# EAGLE board bs_prod (EAGLE 6.5.0)
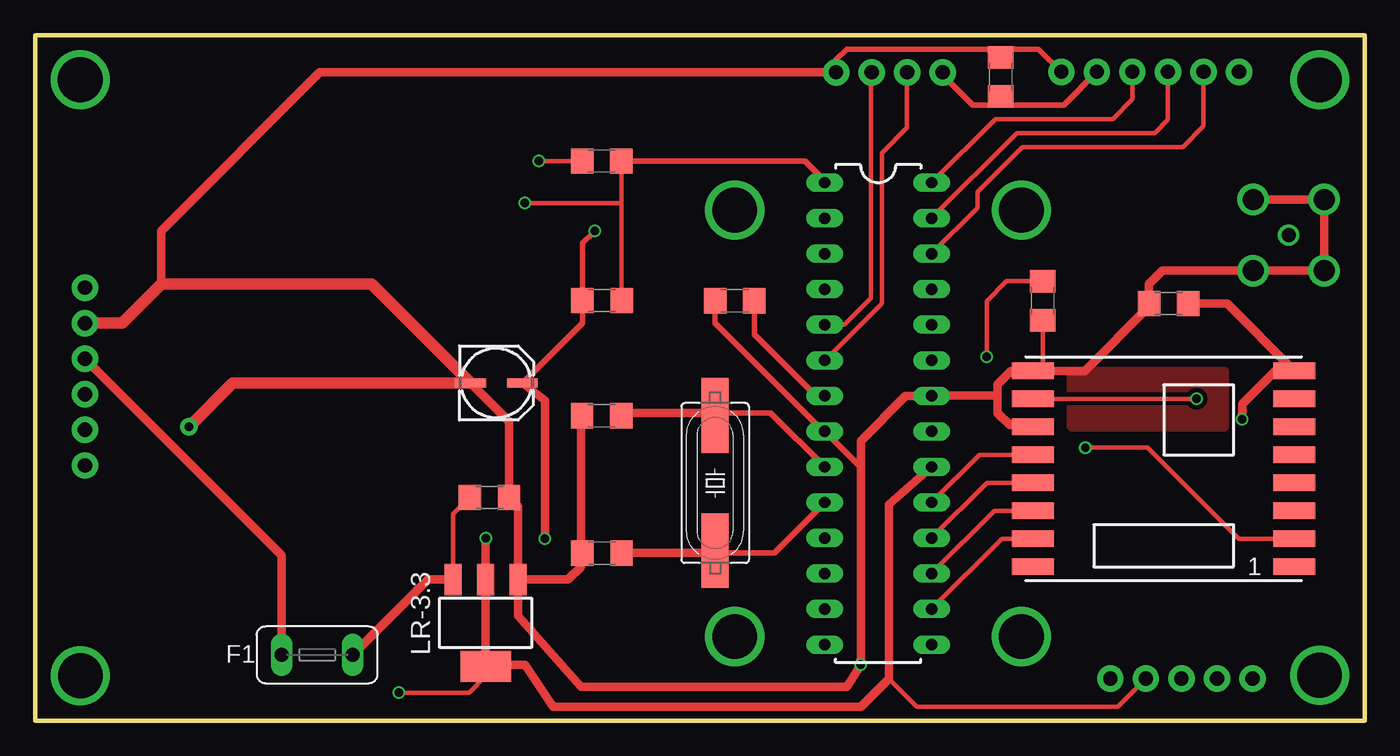
[diagram p0: board, top side]
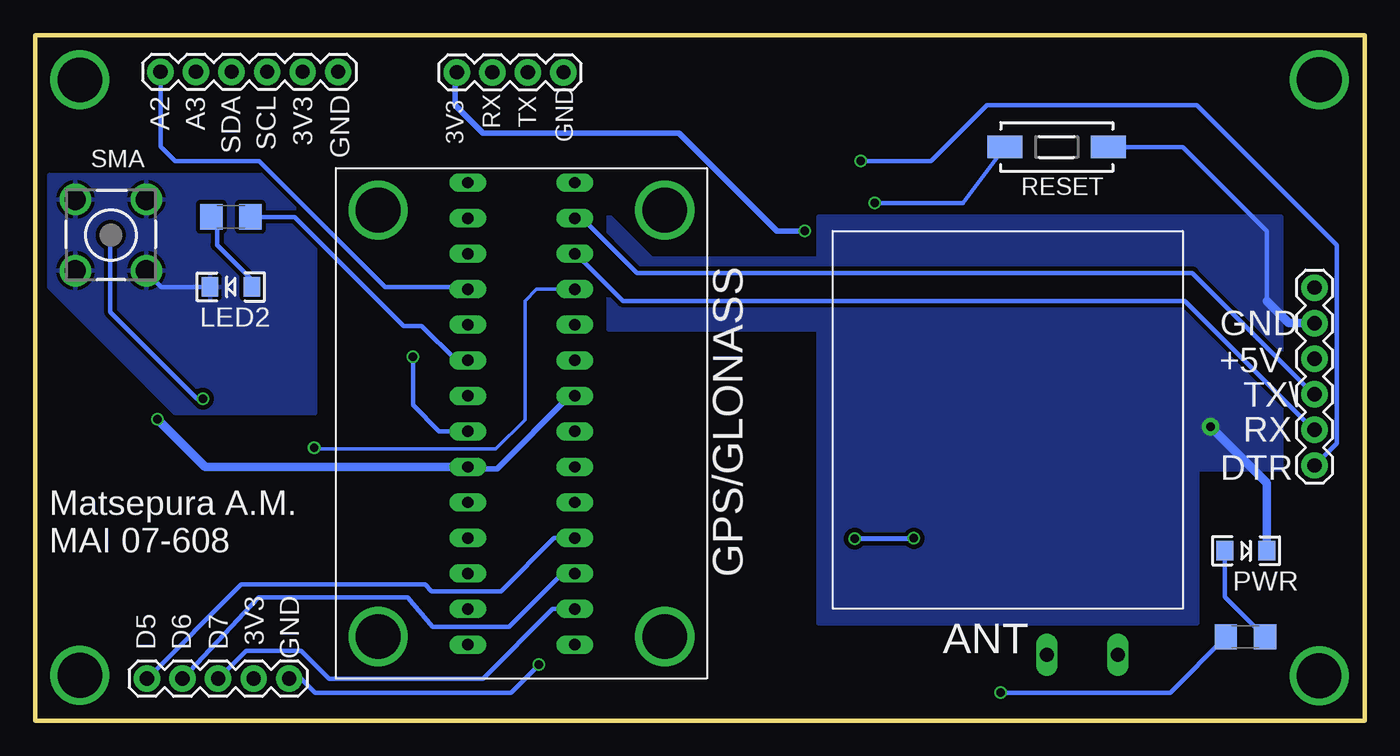
[diagram p1: board, bottom side, seen from below]

Size 95 x 49 mm. Coordinates in mm from the lower left corner, seen from the top.
Outline: 0,49 0,0 95,0 95,49 0,49
Copper layers (1*16): Top 0.035mm / dielectric 1.5mm / Bottom 0.035mm
Design rules "ITEADstudio_DRC *": minimum track width 6mil, minimum drill 12mil, track to track 12mil, track to pad 12mil, pad to pad 12mil, via to via 12mil, smd to smd 0mil, copper to edge 10mil, drill to drill 10mil, minimum pad ring 10mil, minimum via ring 6mil, stop-mask expansion 2mil, vias tented up to drill 100mil, thermal gap 10mil

## Footprints (pad centres in the part's own frame; a part is rotated, then mirrored left to right if it is on the bottom)
1206 = smd 1.6 x 1.8: 1 -1.4,0; 2 1.4,0
PANASONIC_C = smd 2.2 x 0.65: + 1.9,-0.2; - -1.8,-0.2
TE5 = drill 1.016 long: 1 -2.54,0; 2 2.54,0
1X04 = drill 1.016 pad 1.88: 1 0,0; 2 2.54,0; 3 5.08,0; 4 7.62,0
1X06 = drill 1.016 pad 1.88: 1 0,0; 2 2.54,0; 3 5.08,0; 4 7.62,0; 5 10.16,0; 6 12.7,0
1X05 = drill 1.016 pad 1.88: 1 0,0; 2 2.54,0; 3 5.08,0; 4 7.62,0; 5 10.16,0
LED-1206 = smd 1.2 x 1.4: A -1.5,0; C 1.5,0
SOT223 = smd 1.219 x 2.235: 1 -2.311,-3.099; 2 0,-3.099; 3 2.311,-3.099 | smd 3.6 x 2.2: TAB 0,3.099
DTSM-3 = smd 2.5 x 1.6: 1 -3.7,0; 2 3.7,0
BU-SMC-V = drill 1.016: 1 0,0 | drill 1.5: 2 -2.54,2.54; 3 2.54,2.54; 4 2.54,-2.54; 5 -2.54,-2.54
DIL28-3 = drill 0.813 long: 1 -16.51,-3.81; 2 -13.97,-3.81; 3 -11.43,-3.81; 4 -8.89,-3.81; 5 -6.35,-3.81; 6 -3.81,-3.81; 7 -1.27,-3.81; 8 1.27,-3.81; 9 3.81,-3.81; 10 6.35,-3.81; 11 8.89,-3.81; 12 11.43,-3.81; 13 13.97,-3.81; 14 16.51,-3.81; 15 16.51,3.81; 16 13.97,3.81; 17 11.43,3.81; 18 8.89,3.81; 19 6.35,3.81; 20 3.81,3.81; 21 1.27,3.81; 22 -1.27,3.81; 23 -3.81,3.81; 24 -6.35,3.81; 25 -8.89,3.81; 26 -11.43,3.81; 27 -13.97,3.81; 28 -16.51,3.81
RFM69W-XXXS2 = smd 3 x 1.2: 1 -9.35,7; 2 -9.35,5; 3 -9.35,3; 4 -9.35,1; 5 -9.35,-1; 6 -9.35,-3; 7 -9.35,-5; 8 -9.35,-7; 9 9.35,-7; 10 9.35,-5; 11 9.35,-3; 12 9.35,-1; 13 9.35,1; 14 9.35,3; 15 9.35,5; 16 9.35,7
UBLOX = drill 3.2: P$1 -15,9.492; P$2 15.492,9.492; P$3 15.492,-11; P$4 -15,-11
HC49UP = smd 5.334 x 1.93: 1 -4.826,0; 2 4.826,0

## Placement (x,y rotation side)
C1  0.1uF  [1206]  72,30 270 top
C2  10uF  [PANASONIC_C]  32.92,24.32 0 top
C3  20pF  [1206]  40.49,21.79 180 top
C4  20pF  [1206]  40.51,11.97 180 top
C5  0.1uF  [1206]  81,29.81 180 top
C6  0.1uF  [1206]  40.5,39.97 0 top
C7  0.1uF  [1206]  32.48,15.95 0 top
C8  0.1uF  [1206]  50,30 180 top
C9  0.47uF  [1206]  69,46 90 top
F1  500mA  [TE5]  20.16,4.7 0 top
JP2  [1X04]  57.24,46.33 180 bottom
JP3  [1X06]  86.04,46.37 0 bottom
JP4  [1X05]  87,3 0 bottom
JP5  [1X06]  3.57,18.24 90 bottom
LED2  [LED-1206]  81,31 180 bottom
LR-3.3  LM1117IMPX-3.3  [SOT223]  32.2,6.98 180 top
PWR  [LED-1206]  8.47,12.13 0 bottom
R1  10k  [1206]  40.52,30.02 0 top
R2  1k  [1206]  8.51,5.97 0 bottom
R3  1k  [1206]  81,36 180 bottom
RESET  DTSM-3  [DTSM-3]  22,41 0 bottom
SMA  BU-SMC-V  [BU-SMC-V]  89.58,34.7 0 bottom
U1  ATMEGA328P_PDIP  [DIL28-3]  60.25,21.94 270 top
U2  RFM69HW  [RFM69W-XXXS2]  80.65,18 180 top
U$1  UBLOX  [UBLOX]  61,21 90 bottom
Y1  16MHz  [HC49UP]  48.6,16.97 90 top

## Library data of the parts
C1-C9 = SparkFun-Capacitors
F1 = fuse; OC_FARNELL: unknown; OC_NEWARK: unknown
JP2-JP5 = SparkFun-Connectors
LED2 PWR = SparkFun-LED
LR-3.3 = lm1117
R1-R3 = SparkFun-Resistors
RESET = switch-tact
SMA = con-coax; OC_FARNELL: unknown; OC_NEWARK: unknown
U1 = SparkFun-DigitalIC
U2 = SparkFun-RF
U$1 = myGps
Y1 = SparkFun-FreqCtrl

## Nets
3.3V: C2.+ C5.1 C8.1 C9.1 JP2.4 JP3.5 JP4.4 LR-3.3.2 LR-3.3.TAB R1.1 R2.1 U1.7 U1.20 U2.8
5V: C7.1 F1.2 LR-3.3.3
A0: JP3.4 U1.28
A1: JP3.3 U1.27
A2: JP3.2 U1.26
A3: JP3.1 U1.25
D0_RX: JP5.3 U1.2
D1_TX: JP5.2 U1.3
D2: U1.4 U2.2
D5: JP4.1 U1.11
D6: JP4.2 U1.12
D7: JP4.3 U1.13
D10_SS: U1.16 U2.15
D11_MOSI: U1.17 U2.14
D12_MISO: U1.18 U2.13
D13_SCK: U1.19 U2.12
GND: C1.2 C2.- C3.2 C4.2 C5.2 C7.2 C8.2 C9.2 JP2.1 JP3.6 JP4.5 JP5.5 LED2.C LR-3.3.1 PWR.C RESET.2 SMA.2 SMA.3 SMA.4 SMA.5 U1.8 U1.22 U2.9 U2.11
GPS_RX: JP2.2 U1.5
GPS_TX: JP2.3 U1.6
N$5: PWR.A R2.2
N$6: C3.1 U1.9 Y1.2
N$7: C4.1 U1.10 Y1.1
N$8: SMA.1 U2.10
N$9: F1.1 JP5.4
N$11: C6.1 JP5.1
N$12: R3.1 U1.23
N$13: LED2.A R3.2
N$16: C1.1 U1.21
RST: C6.2 R1.2 RESET.1 U1.1

## Tracks (layer width: path | path; a pad name or v marks a point on that pad's centre or on a via)
3.3V  (via drill 0.6)
  Top 0.305: 32,4 32.12,3.88 LR-3.3.TAB 32.2,3.2 31,2 v26,2 | v32.2,13.03 32.2,12.8 | 64.86,46.14 JP2.4 | JP4.4 77.38,1 63,1 61,3 | 55.79,23.21 U1.7 | 69,44 C9.1
  Top 0.406: C2.+ 39.12,28.41 R1.1 39.12,34.12 v40,35 | JP3.5 73.51,44 69,44 67,44 64.86,46.14 | 55.79,23.21 51.4,27.6 C8.1
  Top 0.61: C5.1 85.18,29.81 U2.8 88.62,25 86.26,22.63 v86.26,21.54 | LR-3.3.TAB LR-3.3.2 32.2,12.8 | U1.20 61,15.46 61,3 59,1 37,1 35,4 32,4 | C2.+ 36.43,22.87 v36.43,13
  Bottom 0.305: U1.20 63.94,18 | 75.38,18.14 75.41,18.11 | 56.79,23.21 U1.7 | R2.1 13.89,2 v26,2 | JP2.4 65,46.19
  Bottom 0.406: 63.94,18 62,18 56.79,23.21 | v36.43,13 v32.2,13.03 | 65,46.19 65,44 63,42 49,42 42,35 v40,35
  Bottom 0.61: U1.20 75.38,18.14 | 75.41,18.11 82.83,18.11 v86.26,21.54
5V
  Top 0.305: C7.1 29.89,14.76 LR-3.3.3
  Top 0.61: F1.2 28.08,10.08 LR-3.3.3
A0
  Top 0.305: U1.28 68.61,43 77,43 78.42,44.41 JP3.4
A1
  Top 0.305: U1.27 70.16,42 80,42 80.95,42.95 JP3.3
A2
  Top 0.305: JP3.2 83.5,42.49 82,41 70.54,40.98 67.33,37.77 67.33,36.64 U1.26
A3
  Bottom 0.305: U1.25 64.23,31 70,31 79,40 85,40 86.03,41.03 JP3.1
D0_RX
  Bottom 0.305: U1.2 55.91,35.91 52,32 12.3,32 3.62,23.32 JP5.3
D1_TX
  Bottom 0.305: U1.3 56.37,33.37 53,30 12.84,30 3.62,20.78 JP5.2
D2  (via drill 0.6)
  Top 0.305: U2.2 86,13 79.49,19.51 v75.05,19.51
  Bottom 0.254: 74.95,19.41 62.08,19.41 60,21.48 60,30 59.17,30.83 U1.4
  Bottom 0.305: v75.05,19.51 74.95,19.41
D5
  Bottom 0.305: JP4.1 80.27,9.73 67.13,9.73 66.65,9.25 61.7,9.25 57.9,13.05 U1.11
D6
  Bottom 0.305: JP4.2 79,8.79 68.38,8.79 66.6,6.68 61.11,6.68 57.29,10.51 U1.12
D7
  Bottom 0.305: JP4.3 79.92,5 76,5 74,3 63,3 58.03,7.97 U1.13
D10_SS
  Top 0.305: U1.16 69.09,13 72,13 U2.15
D11_MOSI
  Top 0.305: U1.17 68.55,15 U2.14
D12_MISO
  Top 0.305: U1.18 68.01,17 U2.13
D13_SCK
  Top 0.305: U1.19 67.47,19 72,19 U2.12
GND  (via drill 0.6, 0.6 pad 1.27)
  Top 0.305: U2.11 71.19,21.11 | U2.9 72,25 C1.2 | 79.6,29.6 C5.2 | SMA.4 | JP3.6 71.7,48 71.66,48 71.7,47.95 71.75,47.95 | JP2.1 57.24,47.24 57.22,47.22 57.22,47.07 57.25,47.04 | C3.2 39,21.7 | 39,11 39.11,11.11 C4.2 | 59,18.14 59,18.11 | C7.2 34.51,15.32 | 56.33,20.67 U1.8 | 68,48 68.6,47.4 C9.2 69,48
  Top 0.406: 69.75,25 U2.9 | 71.19,21.11 69.64,21.11 | 57.24,47.24 58,48 68,48 | U1.8 59,18.11 | JP3.6 71.75,47.95 | 57.25,47.04 57.25,46.35 | 71.66,48 69,48 | 56.33,20.67 48.6,28.4 C8.2
  Top 0.61: 69.75,25 68.78,24.03 68.78,23.22 | 69.64,21.11 68.78,21.97 68.78,23.22 | 72,25 75,25 79.6,29.6 | SMA.4 80.57,32.16 79.6,31.19 C5.2 | SMA.4 SMA.5 SMA.2 SMA.3 | 39,21.7 39,11 38.08,10.08 LR-3.3.1 | 59,18.11 v59,4 58,2.42 39,2.42 34.51,7.49 LR-3.3.1 | 34.51,15.32 LR-3.3.1 | C2.- 33.88,21.37 C7.2 | 9,31.18 9,35 20.36,46.35 57.25,46.35 | 59,18.14 59,20 62.21,23.21 U1.22 68.78,23.22
  Top 0.813: v11,21 14.12,24.12 C2.- 24.07,31.18 9,31.18 6.22,28.4 JP5.5
  Bottom 0.305: LED2.C 86,31 87.04,32.04 SMA.4 | PWR.C 7,12.16 | v59,4 61,2 75,2 76,3 JP4.5 | RESET.2 13,41 7,35 7,30
  Bottom 0.61: 7,12.16 7,17 v11,21 | 7,30 5.4,28.4 JP5.5
  pour Bottom: 94,39 75,39 75,22 85,22 87,24 92,29 94,31
  pour Bottom: 39,36 39,33 51,33 54,36 54,28 39,28 39,7 12,7 12,18 6,18 6,36
  pour Top: 74,25 85,25 85,21 74,21
GPS_RX
  Top 0.305: U1.5 56.45,28.3 57.83,28.3 59.74,30.2 59.74,45.67 59.78,45.71 JP2.2
GPS_TX
  Top 0.305: U1.6 60.5,29.8 60.5,40.54 62.32,42.36 JP2.3
N$1  (via drill 3.2)
  other vias: 3.23,45.8
N$2  (via drill 3.2 pad 2.54)
  other vias: 91.79,3.23
N$5
  Bottom 0.305: R2.2 9.97,8.83 PWR.A
N$6
  Top 0.305: 48,22 48.2,21.8 Y1.2 | C3.1 42.1,22
  Top 0.406: U1.9 52.57,22 48,22
  Top 0.61: 42.1,22 48,22
N$7
  Top 0.305: C4.1 41.94,12 | Y1.1 48.75,12 49,12
  Top 0.406: U1.10 52.85,12 49,12
  Top 0.61: 41.94,12 49,12
N$8  (via drill 0.6)
  Top 0.305: v83,23 79,23 U2.10
  Bottom 0.305: SMA.1 89.61,34.67 89.61,29.21 83.4,23 v83,23
N$9
  Top 0.61: JP5.4 17.62,11.81 F1.1
N$10  (via drill 3.2 pad 2.54)
  other vias: 91.79,45.79
N$11  (via drill 0.6)
  Top 0.305: v36,40 36.02,39.98 C6.1
  Bottom 0.305: JP5.1 2,19.81 2,34 12,44 27,44 31,40 v36,40
N$12
  Bottom 0.305: U1.23 64.1,25.78 64.12,25.76 64.92,25.76 67.36,28.19 68.66,28.19 76.46,36 R3.1
N$13
  Bottom 0.305: R3.2 82,35.6 82,34 79.5,31.5 LED2.A
N$16  (via drill 0.6)
  Top 0.305: v68,26 68,30 69.4,31.4 C1.1
  Bottom 0.305: v68,26 68,22.54 66.13,20.67 U1.21
N$17  (via drill 3.2)
  other vias: 3.25,3.2
RST  (via drill 0.6)
  Top 0.305: 41.92,40 C6.2 41.9,37 | 56.44,38.56 U1.1 | R1.2 41.9,30.04 41.9,37 | v35,37 41.9,37
  Top 0.406: 41.92,40 55,40 56.44,38.56
  Bottom 0.305: RESET.1 28.7,37 v35,37

## Text on the board
bNames: GND | 3V3 | SCL | SDA | A3 | A2 | TX | RX | GND | 3V3 | GND | +5V | TX\ | RX | DTR | Matsepura A.M. / MAI 07-608 | GND | 3V3 | D7 | D6 | D5